# EAGLE board TQFP290 (EAGLE 6.6.0)
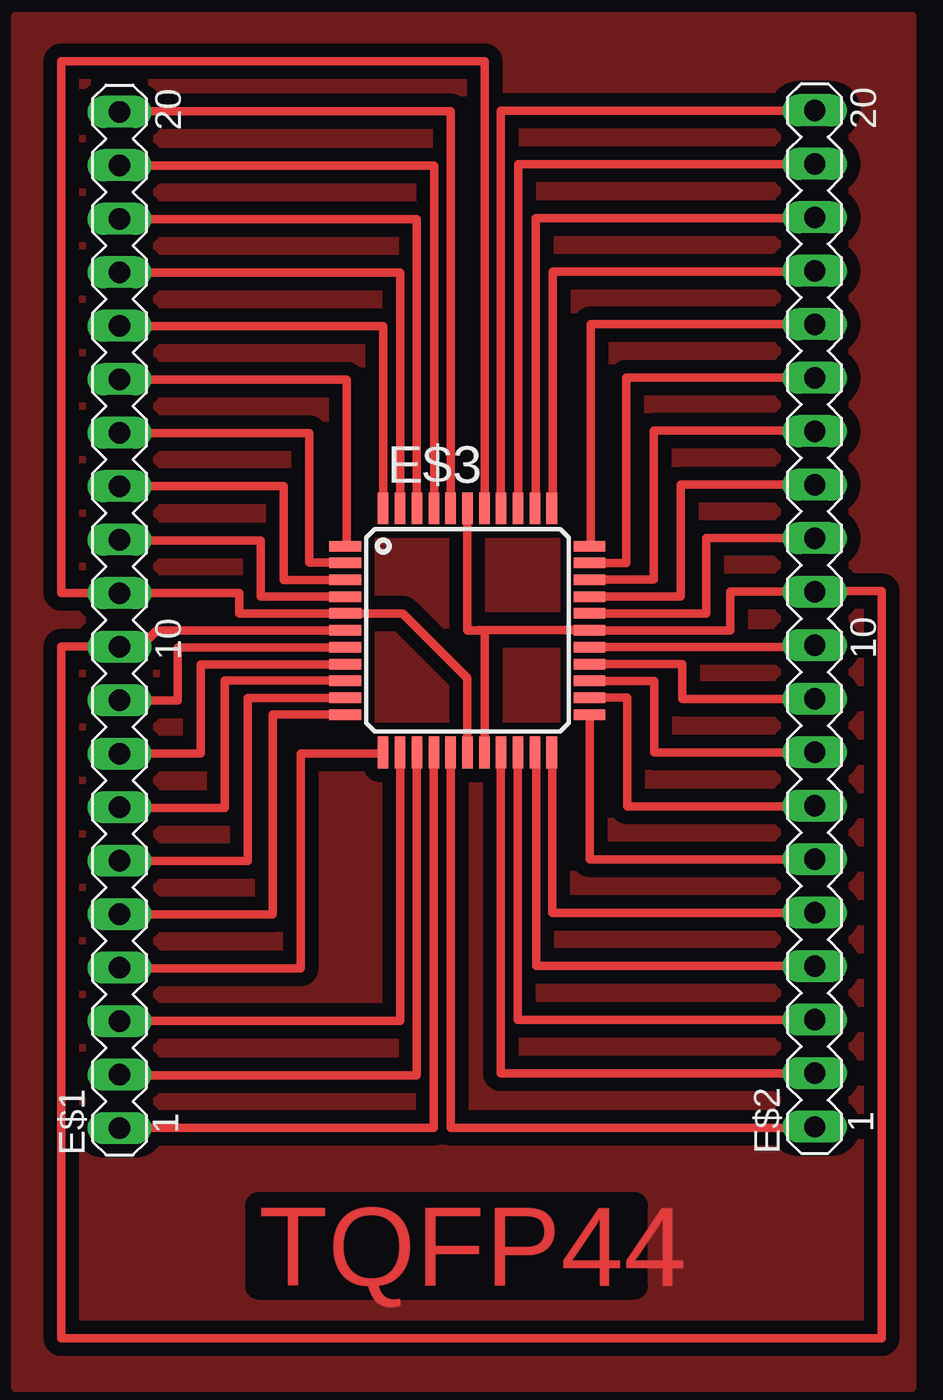
[diagram p0: board, top side]

No outline drawn. Coordinates in mm, seen from the top.
Copper layers (1*16): Top 0.035mm / dielectric 1.5mm / Bottom 0.035mm
Design rules "default *": minimum track width 10mil, minimum drill 24mil, track to track 25mil, track to pad 25mil, pad to pad 25mil, via to via 25mil, smd to smd 25mil, copper to edge 40mil, drill to drill 8mil, minimum pad ring 10mil, minimum via ring 8mil, stop-mask expansion 4mil, vias tented up to drill 0mil, thermal gap 10mil

## Footprints (pad centres in the part's own frame; a part is rotated, then mirrored left to right if it is on the bottom)
MA20-1 = drill 1.016 long: 1 -24.13,0; 2 -21.59,0; 3 -19.05,0; 4 -16.51,0; 5 -13.97,0; 6 -11.43,0; 7 -8.89,0; 8 -6.35,0; 9 -3.81,0; 10 -1.27,0; 11 1.27,0; 12 3.81,0; 13 6.35,0; 14 8.89,0; 15 11.43,0; 16 13.97,0; 17 16.51,0; 18 19.05,0; 19 21.59,0; 20 24.13,0
TQFP44 = smd 1.5 x 0.5: 1 -5.8,4; 2 -5.8,3.2; 3 -5.8,2.4; 4 -5.8,1.6; 5 -5.8,0.8; 6 -5.8,0; 7 -5.8,-0.8; 8 -5.8,-1.6; 9 -5.8,-2.4; 10 -5.8,-3.2; 11 -5.8,-4; 23 5.8,-4; 24 5.8,-3.2; 25 5.8,-2.4; 26 5.8,-1.6; 27 5.8,-0.8; 28 5.8,0; 29 5.8,0.8; 30 5.8,1.6; 31 5.8,2.4; 32 5.8,3.2; 33 5.8,4 | smd 0.5 x 1.5: 12 -4,-5.8; 13 -3.2,-5.8; 14 -2.4,-5.8; 15 -1.6,-5.8; 16 -0.8,-5.8; 17 0,-5.8; 18 0.8,-5.8; 19 1.6,-5.8; 20 2.4,-5.8; 21 3.2,-5.8; 22 4,-5.8; 34 4,5.8; 35 3.2,5.8; 36 2.4,5.8; 37 1.6,5.8; 38 0.8,5.8; 39 0,5.8; 40 -0.8,5.8; 41 -1.6,5.8; 42 -2.4,5.8; 43 -3.2,5.8; 44 -4,5.8

## Placement (x,y rotation side)
E$1  [MA20-1]  4.95,35.05 90 top
E$2  [MA20-1]  37.94,35.12 90 top
E$3  [TQFP44]  21.46,34.56 0 top

## Library data of the parts
E$1 E$2 = con-lstb
E$3 = atmel

## Nets
S$8: E$3.30
S$19: E$1.13

## Tracks (layer width: path | path; a pad name or v marks a point on that pad's centre or on a via)
S$1
  Top 0.406: 23.04,40.24 23.04,59.24 37.98,59.24
S$2
  Top 0.406: 23.88,40.24 23.88,56.7 37.98,56.7
S$3
  Top 0.406: 24.71,40.15 24.71,54.13 38.02,54.13
S$4
  Top 0.406: 25.5,40.2 25.5,51.59 38.02,51.59
S$5
  Top 0.406: 27.31,38.56 27.31,49.1 37.99,49.1
S$6
  Top 0.406: 37.96,46.56 28.99,46.56 28.99,37.75 27.08,37.75
S$7
  Top 0.406: 37.94,44.04 30.29,44.04 30.29,36.97 27.23,36.97
S$8
  Top 0.406: 37.96,41.48 31.59,41.48 31.59,36.16 E$3.30
S$9
  Top 0.406: 37.96,38.94 32.8,38.94 32.8,35.36 27,35.36
S$10
  Top 0.406: 37.94,36.4 33.92,36.4 33.92,34.55 27.34,34.55 | 27.34,34.55 27.31,34.55 | 21.97,34.57 27.34,34.57 27.34,34.55
S$11
  Top 0.406: 27.43,33.77 38.08,33.77
S$12
  Top 0.406: 20.67,40.4 20.67,59.2 4.86,59.2
S$13
  Top 0.406: 19.88,40.24 19.88,56.62 4.91,56.62
S$14
  Top 0.406: 19.05,40.28 19.05,54.08 4.91,54.08
S$15
  Top 0.406: 18.26,40.32 18.26,51.55 4.86,51.55
S$16
  Top 0.406: 17.47,40.24 17.47,49.01 4.86,49.01
S$17
  Top 0.406: 15.72,38.57 15.72,46.47 4.86,46.47
S$18
  Top 0.406: 4.98,43.92 13.95,43.92 13.95,37.77 15.75,37.77
S$19
  Top 0.406: E$1.13 12.75,41.4 12.75,36.95 15.8,36.95
S$20
  Top 0.406: 4.95,38.83 11.66,38.83 11.66,36.16 15.75,36.16
S$21
  Top 0.406: 15.71,35.37 10.63,35.37 10.63,36.33 4.95,36.33
S$22
  Top 0.406: 15.71,34.55 6.71,34.55 6.13,33.97
S$23
  Top 0.406: 15.75,33.75 7.7,33.75 7.7,31.23 4.95,31.23
S$24
  Top 0.406: 15.95,32.94 8.8,32.94 8.8,28.71 4.93,28.71
S$25
  Top 0.406: 15.87,32.17 9.93,32.17 9.93,26.13 4.95,26.13
S$26
  Top 0.406: 15.78,31.35 11.04,31.35 11.04,23.61 4.98,23.61
S$27
  Top 0.406: 15.8,30.56 12.22,30.56 12.22,21.08 4.93,21.08
S$28
  Top 0.406: 17.45,28.72 13.55,28.72 13.55,18.5 4.92,18.5
S$29
  Top 0.406: 18.26,28.72 18.26,16.02 4.95,16.02
S$30
  Top 0.406: 19.06,28.74 19.06,13.43 4.96,13.43
S$31
  Top 0.406: 19.86,28.74 19.86,10.94 4.96,10.94
S$32
  Top 0.406: 20.67,28.68 20.67,10.93 38,10.93
S$33
  Top 0.406: 23.04,28.67 23.04,13.53 37.97,13.53
S$34
  Top 0.406: 23.84,28.75 23.84,16.06 38.05,16.06
S$35
  Top 0.406: 24.72,28.75 24.72,18.62 38.01,18.62
S$36
  Top 0.406: 25.48,28.67 25.48,21.14 38.01,21.14
S$37
  Top 0.406: 27.26,30.53 27.26,23.68 38.03,23.68
S$38
  Top 0.406: 27.2,31.37 29.04,31.37 29.04,26.2 38.02,26.2
S$39
  Top 0.406: 27.14,32.15 30.32,32.15 30.32,28.77 38.02,28.77
S$40
  Top 0.406: 27.4,32.97 31.66,32.97 31.66,31.31 38.02,31.31
S$41
  Top 0.406: 21.45,40.38 21.45,34.56 22.29,34.56 22.29,28.79
S$42
  Top 0.406: 21.59,34.6 21.59,34.56
S$43
  Top 0.406: 22.29,40.23 22.29,61.58 2.19,61.58 2.19,36.32 5.05,36.32
S$44
  Top 0.406: 37.92,36.43 41.11,36.43 41.11,0.95 2.18,0.95 2.18,33.79 4.97,33.79
S$45
  Top 0.406: 15.88,35.35 18.39,35.35 21.45,32.29 21.45,28.88
S$46
  pour Top: 0,0 0,63.71 42.58,63.71 42.58,-1.41 0.76,-1.41 0,-1.41 0,-0.02

## Text on the board
Top: TQFP44